# Altium PCB LIN_EXPO.PcbDoc
Units mil, origin at the board's own origin, x right, y up, seen from the top; angles counter-clockwise.
Board outline 7120 x 5605 mil, 2 copper layers (Top Layer, Bottom Layer), stack 61.811 mil thick; 23 components, 16 nets, 78 pads, 3 vias.
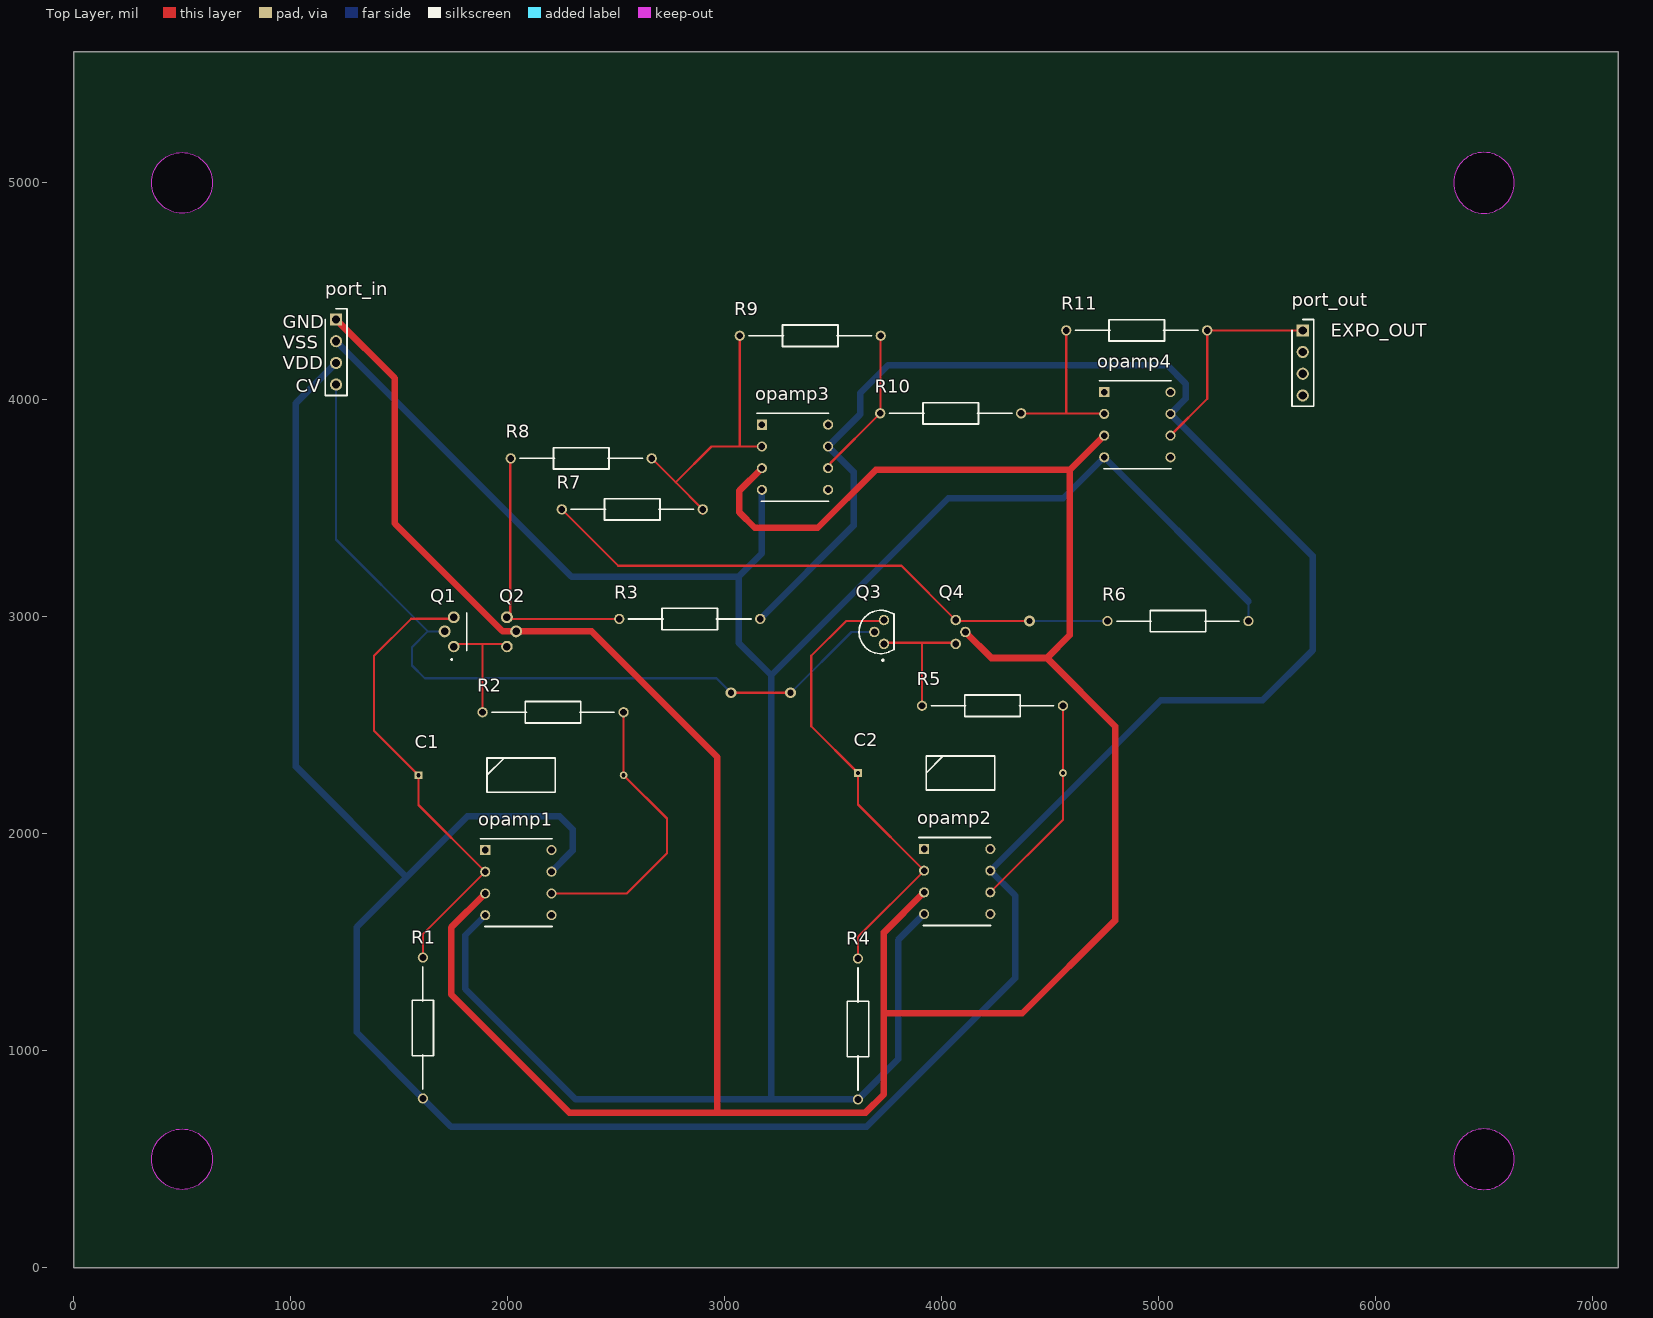
[diagram p0: Top Layer view]
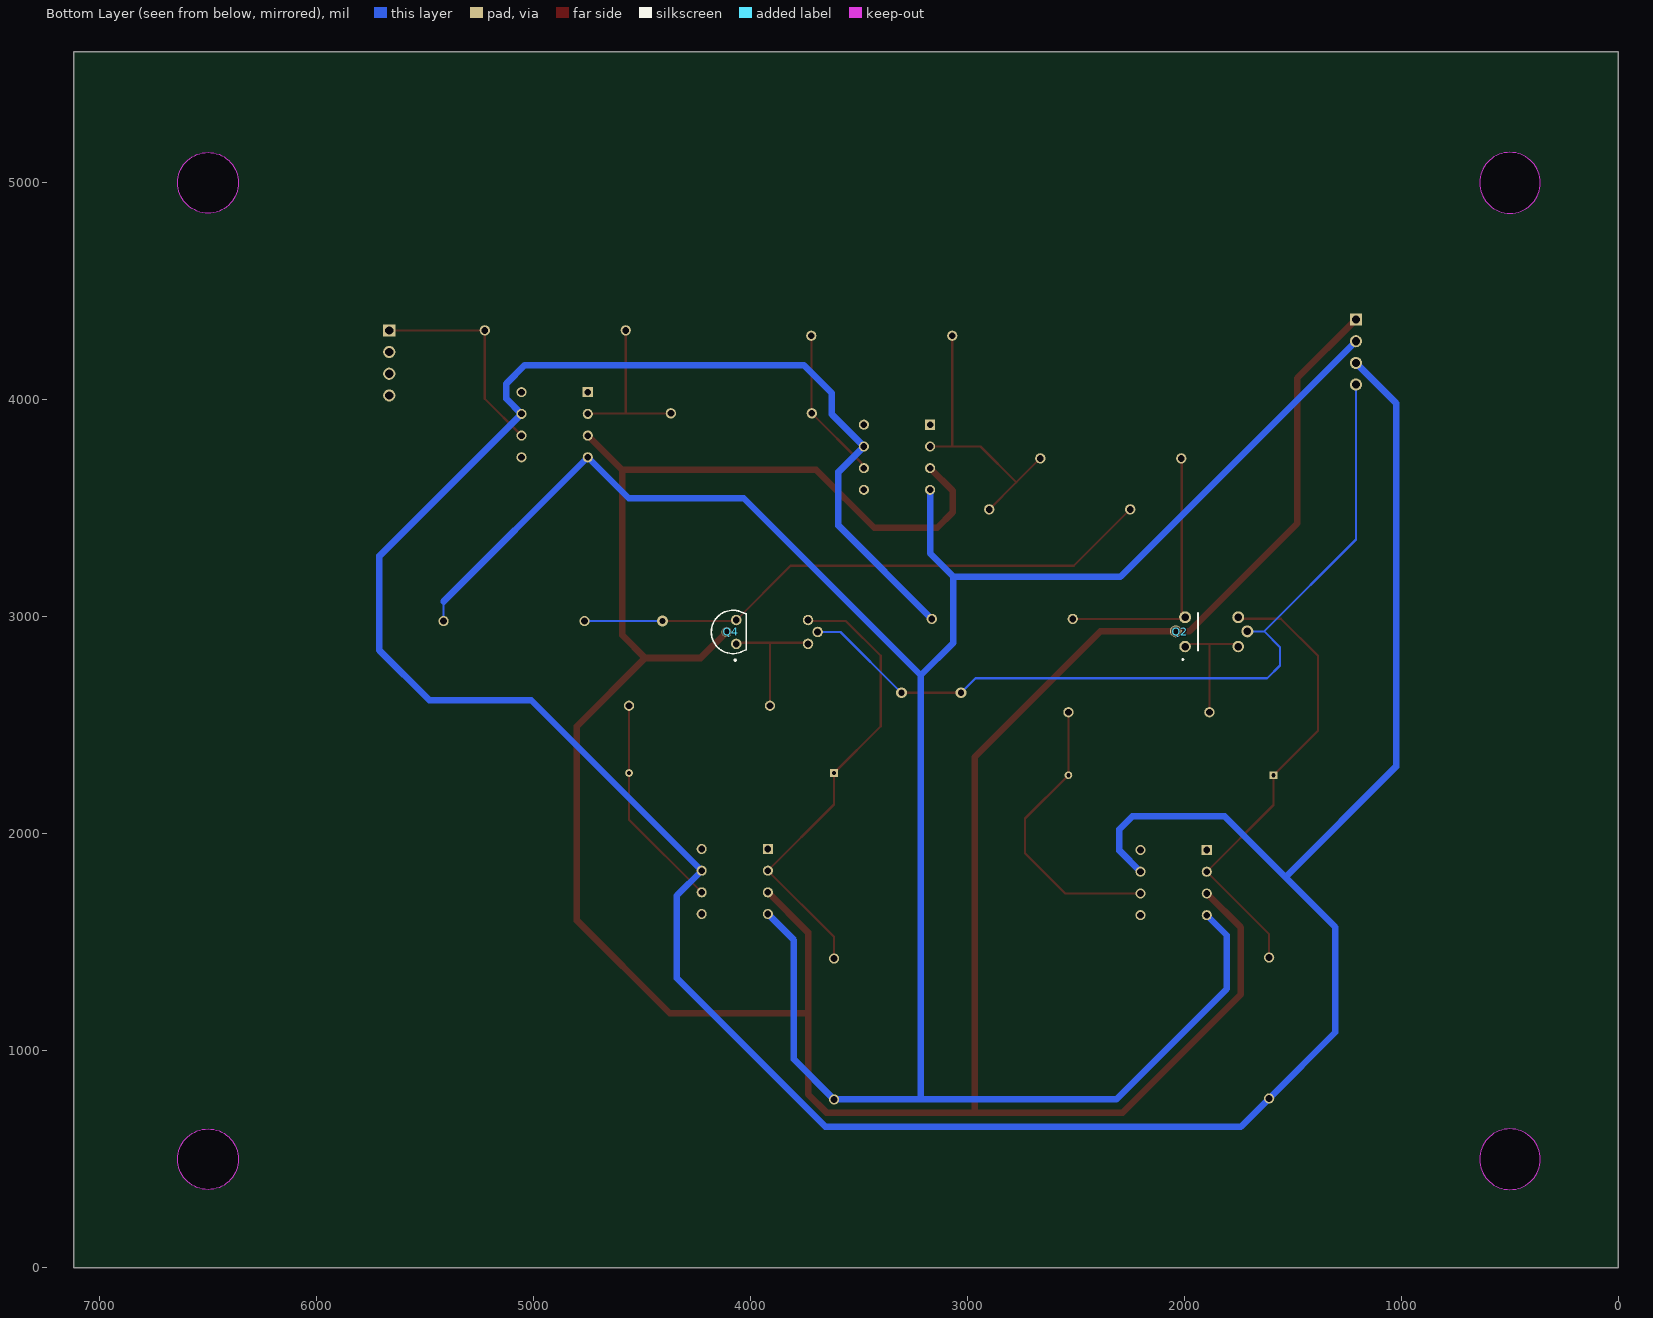
[diagram p1: Bottom Layer view, seen from below]
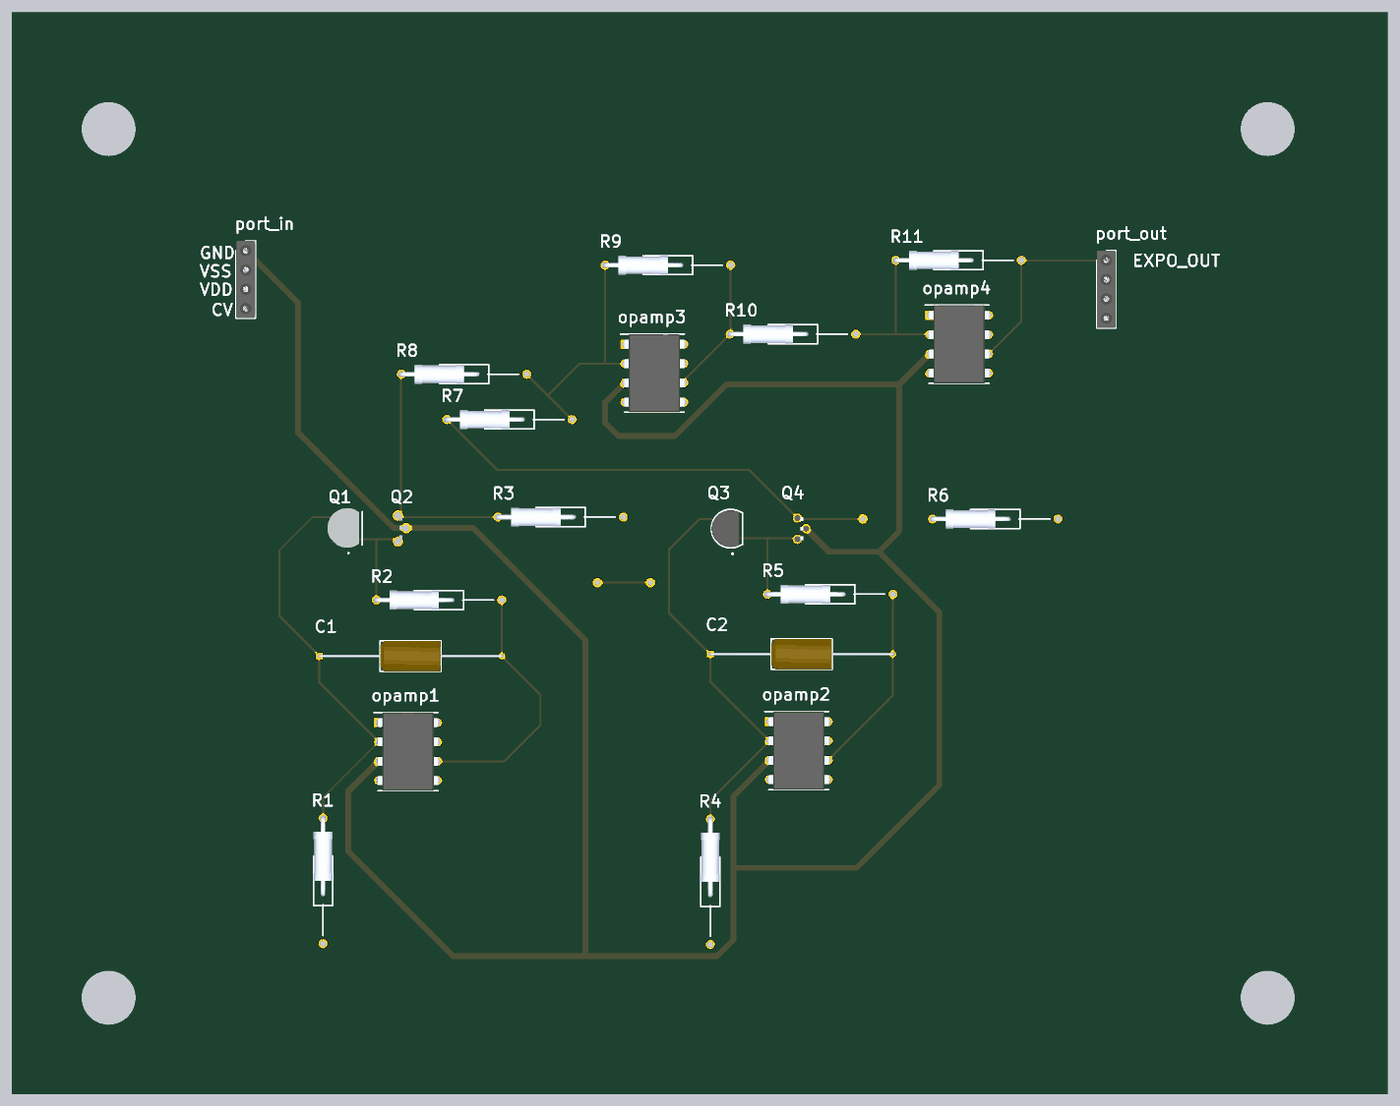
[diagram p2: 3D render of the assembled board from above, using the file's embedded part models]

## Layer stack, top to bottom
Top Solder: solder mask 0.5, Solder Resist, Dk 3.5
Top Layer: signal copper 1.378
Dielectric 1: dielectric 59.055, FR-4, Dk 4.5
Bottom Layer: signal copper 1.378
Bottom Solder: solder mask 0.5, Solder Resist, Dk 3.5

## Board outline
0,0 0,5605 7120,5605 7120,0
cut-out: 6360,5000 ccw(c6500,5000) 6500,4860 ccw(c6500,5000) 6640,5000 ccw(c6500,5000) 6500,5140 ccw(c6500,5000)
cut-out: 6360,500 ccw(c6500,500) 6500,360 ccw(c6500,500) 6640,500 ccw(c6500,500) 6500,640 ccw(c6500,500)
cut-out: 500,360 cw(c500,500) 360,500 cw(c500,500) 500,640 cw(c500,500) 640,500 cw(c500,500)
cut-out: 500,4860 cw(c500,5000) 360,5000 cw(c500,5000) 500,5140 cw(c500,5000) 640,5000 cw(c500,5000)

## Design rules (kind name [scope] priority, off if disabled: settings)
Clearance [All] p1: gap=10 ignorepadtopadclearanceinfootprint=FALSE
PolygonConnect [All] p1: connectstyle=Relief reliefconductorwidth=10 reliefentries=4 polygonreliefangle="90 Angle" airgapwidth=10
RoutingVias [All] p1: holewidth=28 width=50 viastyle="Through Hole" minholewidth=28 minwidth=50 maxholewidth=28 maxwidth=50
SolderMaskExpansion [All] p1: expansion=4 istentingtop=FALSE
SupplyNets "Schematic Supply Nets_2" [InNet('GND')] p1: voltage=0.000
SupplyNets "Schematic Supply Nets_1" [InNet('VSS')] p2: voltage=0.000
SupplyNets "Schematic Supply Nets" [InNet('VDD')] p3: voltage=0.000
Width [All] p1: maxlimit=30 minlimit=10 preferedwidth=10 minimp=50.000000 maximp=50.000000 favimp=50.000000
30 further rules are at their usual default settings.

## Components (designator, comment, footprint, x,y, rotation, side; value= is the part's Value field where it differs from the comment)
C1 "50p" CAPPA2400W30L800D400 1590.12,2270 r0 top
C2 "50p" CAPPA2400W30L800D400 3615,2280 r0 top
opamp1 "OP27AZ" DIP775W58P254L1029H508Q8N 2050,1775 r0 top
opamp2 "OP27AZ" DIP775W58P254L1029H508Q8N 4072.56,1780 r0 top
opamp3 "OP27AZ" DIP775W58P254L1029H508Q8N 3325,3735 r0 top
opamp4 "OP27AZ" DIP775W58P254L1029H508Q8N 4902.56,3885 r0 top
port_in "929870-01-04-RA" RHDR4W76P0X254_1X4_1016X254X826P 1210,4370 r270 top
port_out "929870-01-04-RA" RHDR4W76P0X254_1X4_1016X254X826P 5665,4320 r270 top
Q1 "2N3904" CS_TO-92 1647.48,2932.87 r90 top
Q2 "2N3904" CS_TO-92 2102.52,2932.87 r90 bottom
Q3 "2N3906" 2N5457 3730,2880 r90 top
Q4 "2N3906" 2N5457 4070.63,2880 r90 bottom
R1 "1.5M" RESAD1650W60L650D250 1610,1429.61 r270 top
R2 "1.5k" RESAD1650W60L650D250 1885.39,2560 r0 top
R3 "30k" RESAD1650W60L650D250 2515,2990 r0 top
R4 "1.5M" RESAD1650W60L650D250 3615,1425 r270 top
R5 "1.5k" RESAD1650W60L650D250 3910.39,2590 r0 top
R6 "30k" RESAD1650W60L650D250 4765,2980 r0 top
R7 "10k" RESAD1650W60L650D250 2250.39,3495 r0 top
R8 "10k" RESAD1650W60L650D250 2015,3730 r0 top
R9 "10k" RESAD1650W60L650D250 3070.39,4295 r0 top
R10 "10k" RESAD1650W60L650D250 3717.63,3937.63 r0 top
R11 "33k" RESAD1650W60L650D250 4575,4320 r0 top

## Footprints (in the part's own frame and the unit in brackets; to place one, negate y for a bottom-side part, rotate by r counter-clockwise, add the part's x,y. Pads: shape width x height; smd on the part's side, far side on the other; paste and mask are expansions set on the pad)
2N5457 [mm]
  round 1.23 hole 0.8: 1(-0.127,-0.127) 2(1.27,1) 3(2.667,-0.127)
  silkscreen extent -2.13,-1.3 3.81,2.79, body extent -1.14,-0.88 3.68,2.8, height 7.44
CAPPA2400W30L800D400 [mm]
  rect 0.9x0.9 hole 0.5: 1(0,0)
  round 0.9 hole 0.5: 2(24,0)
  silkscreen extent 8,-2 16,2, body extent -0.15,-2 24.15,2, height 3.99
CS_TO-92 [mm]
  round 1.35 hole 0.88: 1(-1.778,-2.667)
  round 1.4 hole 0.88: 2(0,-1.6) 3(1.651,-2.667)
  silkscreen extent -3.36,-4.19 2.16,-2.35, body extent -2.59,-3.81 2.63,0.37, height 5.56
DIP775W58P254L1029H508Q8N [mm]
  rect 1.18x1.18 hole 0.78: 1(-3.875,3.81)
  round 1.18 hole 0.78: 2(-3.875,1.27) 3(-3.875,-1.27) 4(-3.875,-3.81) 5(3.875,-3.81) 6(3.875,-1.27) 7(3.875,1.27) 8(3.875,3.81)
  silkscreen extent -4.46,-5.15 3.94,5.15, body extent -4.02,-5.15 4.02,5.15, height 5.08
RESAD1650W60L650D250 [mm]
  round 1.2 hole 0.8: 1(0,0) 2(16.5,0)
  silkscreen extent 1.08,-1.25 15.42,1.25, body extent -0.3,-1.25 10.3,1.25, height 2.55
RHDR4W76P0X254_1X4_1016X254X826P [mm]
  rect 1.425x1.425 hole 0.95: 1(0,0)
  round 1.425 hole 0.95: 2(2.54,0) 3(5.08,0) 4(7.62,0)
  silkscreen extent -1.27,-1.27 8.89,1.27, body extent -1.27,-1.27 8.89,1.27, height 8.26

## Part data
C1 C2: library part 0113207, "Capacitor", Manufacturer_Name="RS Pro", Datasheet Link=https://docs.rs-online.com/d68c/0900766b8157e121.pdf, Manufacturer_Part_Number=0113207
opamp1 opamp2 opamp3 opamp4: "Integrated Circuit", Manufacturer_Name="Analog Devices", Mouser Part Number=700-OP27AZNR, Arrow Part Number=OP27AZ, Arrow Price/Stock=https://www.arrow.com/en/products/op27az/analog-devices, Datasheet Link=https://www.analog.com/media/en/technical-documentation/data-sheets/OP27.pdf, Height=5.08mm, Manufacturer_Part_Number=OP27AZ, Mouser Price/Stock=https://www.mouser.co.uk/ProductDetail/Maxim-Integrated/OP27AZ?qs=7RslVrYcaDTFV9h3XrpsTA%3D%3D
port_in port_out: "Connector", Manufacturer_Name=3M, Mouser Part Number=517-929870-01-04-RA, Arrow Part Number=929870-01-04-RA, Arrow Price/Stock=https://www.arrow.com/en/products/929870-01-04-ra/3m, Datasheet Link=https://componentsearchengine.com/Datasheets/2/929870-01-04-RA.pdf, Height=8.26mm, Manufacturer_Part_Number=929870-01-04-RA, Mouser Price/Stock=https://www.mouser.co.uk/ProductDetail/3M-Electronic-Solutions-Division/929870-01-04-RA?qs=neFkstNq%252B6GPZEKactAgTg%3D%3D
Q1 Q2: "Transistor BJT NPN", Manufacturer_Name="Central Semiconductor", Mouser Part Number=610-2N3904, Datasheet Link=https://my.centralsemi.com/get_document.php?cmp=1&mergetype=pd&mergepath=pd&pdf_id=2N3903.PDF, Manufacturer_Part_Number=2N3904, Mouser Price/Stock=https://www.mouser.com/Search/Refine.aspx?Keyword=610-2N3904
Q3 Q4: "Transistor BJT PNP", Manufacturer_Name="Central Semiconductor", Mouser Part Number=610-2N3906, Arrow Part Number=2N3906, Arrow Price/Stock=https://www.arrow.com/en/products/2n3906/central-semiconductor?region=nac, Datasheet Link=http://www.mouser.com/datasheet/2/68/2n3905-29545.pdf, Height=5.33mm, Manufacturer_Part_Number=2N3906, Mouser Price/Stock=https://www.mouser.com/Search/Refine.aspx?Keyword=610-2N3906
R1 R2 R3 R4 R5 R6 R7 R8 R9 R10 R11: library part MRS25000C1003FC100, "Resistor", Manufacturer_Name=Vishay, Mouser Part Number=594-MRS25000C1003FC1, Arrow Part Number=MRS25000C1003FC100, Arrow Price/Stock=https://www.arrow.com/en/products/mrs25000c1003fc100/vishay?region=nac, Datasheet Link=http://www.vishay.com/docs/28724/mrs16m25.pdf, Manufacturer_Part_Number=MRS25000C1003FC100, Mouser Price/Stock=https://www.mouser.co.uk/ProductDetail/Vishay-BC-Components/MRS25000C1003FC100?qs=H30XFsNYD%2FHyk6mBpuomxg%3D%3D

## Via types
v1: diameter 50, hole 28, Top Layer to Bottom Layer, 3 vias

## Nets (pads, with @x,y where several pads share a name; then routed paths per layer and width w, separated by ;. In a path a pad name is that pad's centre, name@x,y a point inside that pad or via, vN(x,y) a via of type N, cw(c..) or ccw(c..) an arc to the next point about the centre after c; other vN are vias at no path point)
GND: opamp1.3 opamp2.3 opamp3.3 opamp4.3 port_in.1 Q2.2 Q4.2 | length 14467.4
  Top Layer w30: port_in.1 1480,4100 1480,3430 1977.13,2932.87 Q2.2 2387.13,2932.87 2967.5,2352.5 2967.5,715 ; opamp1.3 1740,1567.56 1740,1260 2285,715 2967.5,715 ; opamp3.3 3069.14,3581.7 3069.14,3480.86 3140,3410 3430,3410 3696.66,3676.66 4591.66,3676.66 ; opamp2.3 3735,1545 3735,1172.5 ; Q4.2 4230,2810 4485.97,2810 ; opamp4.3 4591.66,3676.66 ; 2967.5,715 3650,715 3735,800 3735,1172.5 ; 3735,1172.5 4372.5,1172.5 4800,1600 4800,2495.97 4485.97,2810 ; 4485.97,2810 4591.66,2915.69 4591.66,3676.66
NetC1_1: C1.1 opamp1.2 Q1.3 R1.1 | length 2147.4
  Top Layer w10: R1.1 1610,1537.56 opamp1.2 1590.12,2132.32 C1.1 1385,2475.12 1385,2820 1555.75,2990.75 Q1.3@1740,2990.75
NetC1_2: C1.2 opamp1.6 R2.2 | length 1341.9
  Top Layer w10: opamp1.6 2550,1725 2735,1910 2735,2070 C1.2 R2.2
NetC2_1: C2.1 opamp2.2 Q3.3 R4.1 | length 2133
  Top Layer w10: R4.1 3615,1525 opamp2.2 3615,2135 C2.1 3400,2495 3400,2820 3560,2980 Q3.3@3730,2980
NetC2_2: C2.2 opamp2.6 R5.2 | length 998.7
  Top Layer w10: opamp2.6 4559.88,2064.76 C2.2 4559.94,2280.06 4559.94,2589.94 R5.2
Netopamp3_2: opamp3.2 R7.2 R8.2 R9.1 | length 1328.7
  Top Layer w10: R8.2 2774.8,3619.8 ; R7.2@2900,3475.01 2900,3494.61 2774.8,3619.8 ; R9.1 3070.39,3785.39 3070,3785 ; opamp3.2 3070,3785 ; 2774.8,3619.8 2940,3785 3070,3785
Netopamp3_6: opamp3.6 R9.2 R10.1 | length 710.4
  Top Layer w10: opamp3.6 3477.56,3694.87 3488.31,3705.62 3488.31,3708.31 R10.1 3718.82,3938.82 3718.82,4293.82 R9.2
Netopamp4_2: opamp4.2 R10.2 R11.1 | length 767.5
  Top Layer w10: R10.2 4368.56,3936.32 4575,3936.32 ; R11.1 4575,3936.32 ; opamp4.2 4748.68,3936.32 4575,3936.32
Netopamp4_6: opamp4.6 port_out.1 R11.2 | length 995.6
  Top Layer w10: opamp4.6 5224.61,4004.49 R11.2 port_out.1
Netport_in_4: port_in.4 Q1.2 Q3.2 | length 3875.8
  Top Layer w10: v1(3030,2650) v1(3305,2650)
  Bottom Layer w10: port_in.4 1210,3355.75 1632.87,2932.87 ; Q1.2 1632.87,2932.87 ; v1(3030,2650) 2963.24,2716.76 1619.1,2716.76 1560,2775.86 1560,2860 1632.87,2932.87 ; v1(3305,2650) 3585,2930 Q3.2
NetQ1_1: Q1.1 Q2.1 R2.1 | length 585.2
  Top Layer w10: Q1.1@1740,2875 1885,2875 ; R2.1 1885.39,2874.61 1885,2875 ; Q2.1@2010,2875 1885,2875
NetQ2_3: Q2.3 R3.1 R8.1 | length 1246.6
  Top Layer w10: R8.1 2012.5,3727.5 2012.5,2993.25 2010,2990.75 2010.37,2990.37 2514.63,2990.37 R3.1
NetQ3_1: Q3.1 Q4.1 R5.1 | length 630.8
  Top Layer w10: Q3.1@3730,2880 3910,2880 ; R5.1 3910.39,2879.61 3910,2880 ; Q4.1@4070.63,2880 3910,2880
NetQ4_3: Q4.3 R6.1 R7.1 | length 2727.9
  Top Layer w10: R7.1 2510.39,3235 3815.63,3235 4070.63,2980 v1(4405,2980)
  Bottom Layer w10: v1(4405,2980) R6.1
VDD: opamp1.7 opamp2.7 opamp3.7 opamp4.7 port_in.3 R1.2 R3.2 | length 15003.9
  Bottom Layer w30: port_in.3 1025,3985 1025,2310 1535,1800 ; opamp1.7 2300,1922.44 2300,2020.86 2240.86,2080 1815,2080 1535,1800 ; R3.2 3595,3420.39 3595,3667.56 opamp3.7 3625,3932.44 3625,4030 3755,4160 5040,4160 5125,4075 5125,4004.88 opamp4.7 5710,3280.12 5710,2845 5480,2615 5010.12,2615 opamp2.7 4340,1715.12 4340,1335 3655,650 1740,650 R1.2 1305,1085 1305,1570 1535,1800
VSS: opamp1.4 opamp2.4 opamp3.4 opamp4.4 port_in.2 R4.2 R6.2 | length 11582.6
  Bottom Layer w10: R6.2 5414.61,3070.39
  Bottom Layer w30: port_in.2 2295,3185 3065,3185 ; opamp1.4 1805,1532.56 1805,1285 2314.61,775.39 3215,775.39 ; opamp3.4 3172.44,3292.44 3065,3185 ; opamp2.4 3800,1510 3800,960.39 R4.2 3215,775.39 ; 5414.61,3070.39 opamp4.4 4561.08,3546.08 4031.08,3546.08 3215,2730 ; 3065,3185 3065,2880 3215,2730 ; 3215,775.39 3215,2730
pads on no net: opamp1.1 opamp1.5 opamp1.8 opamp2.1 opamp2.5 opamp2.8 opamp3.1 opamp3.5 opamp3.8 opamp4.1 opamp4.5 opamp4.8 port_out.2 port_out.3 port_out.4

## Silkscreen, mask and mechanical layers (free items; w line width, h text height)
Top Overlay:
  text "GND" at 965,4330 h60
  text "EXPO_OUT" at 5795,4290 h60
  text "VSS" at 965,4235 h60
  text "VDD" at 965,4140 h60
  text "CV" at 1025,4035 h60
Mechanical 1:
  circle w10: c6500,500 r140
  circle w10: c6500,5000 r140
  circle w10: c500,5000 r140
  circle w10: c500,500 r140
  lines w10: 0,0 7120,0 7120,5605 0,5605 0,0